# Altium PCB nexus5.PcbDoc (part 1 of 2)
Units mm, origin at the board's own origin, x right, y up, seen from the top; angles counter-clockwise.
Board outline 100 x 100 mm, 2 copper layers (Top Layer, Bottom Layer); 163 components, 162 nets, 798 pads, 136 vias.
Unrouted connection lines stored in the file: 4.
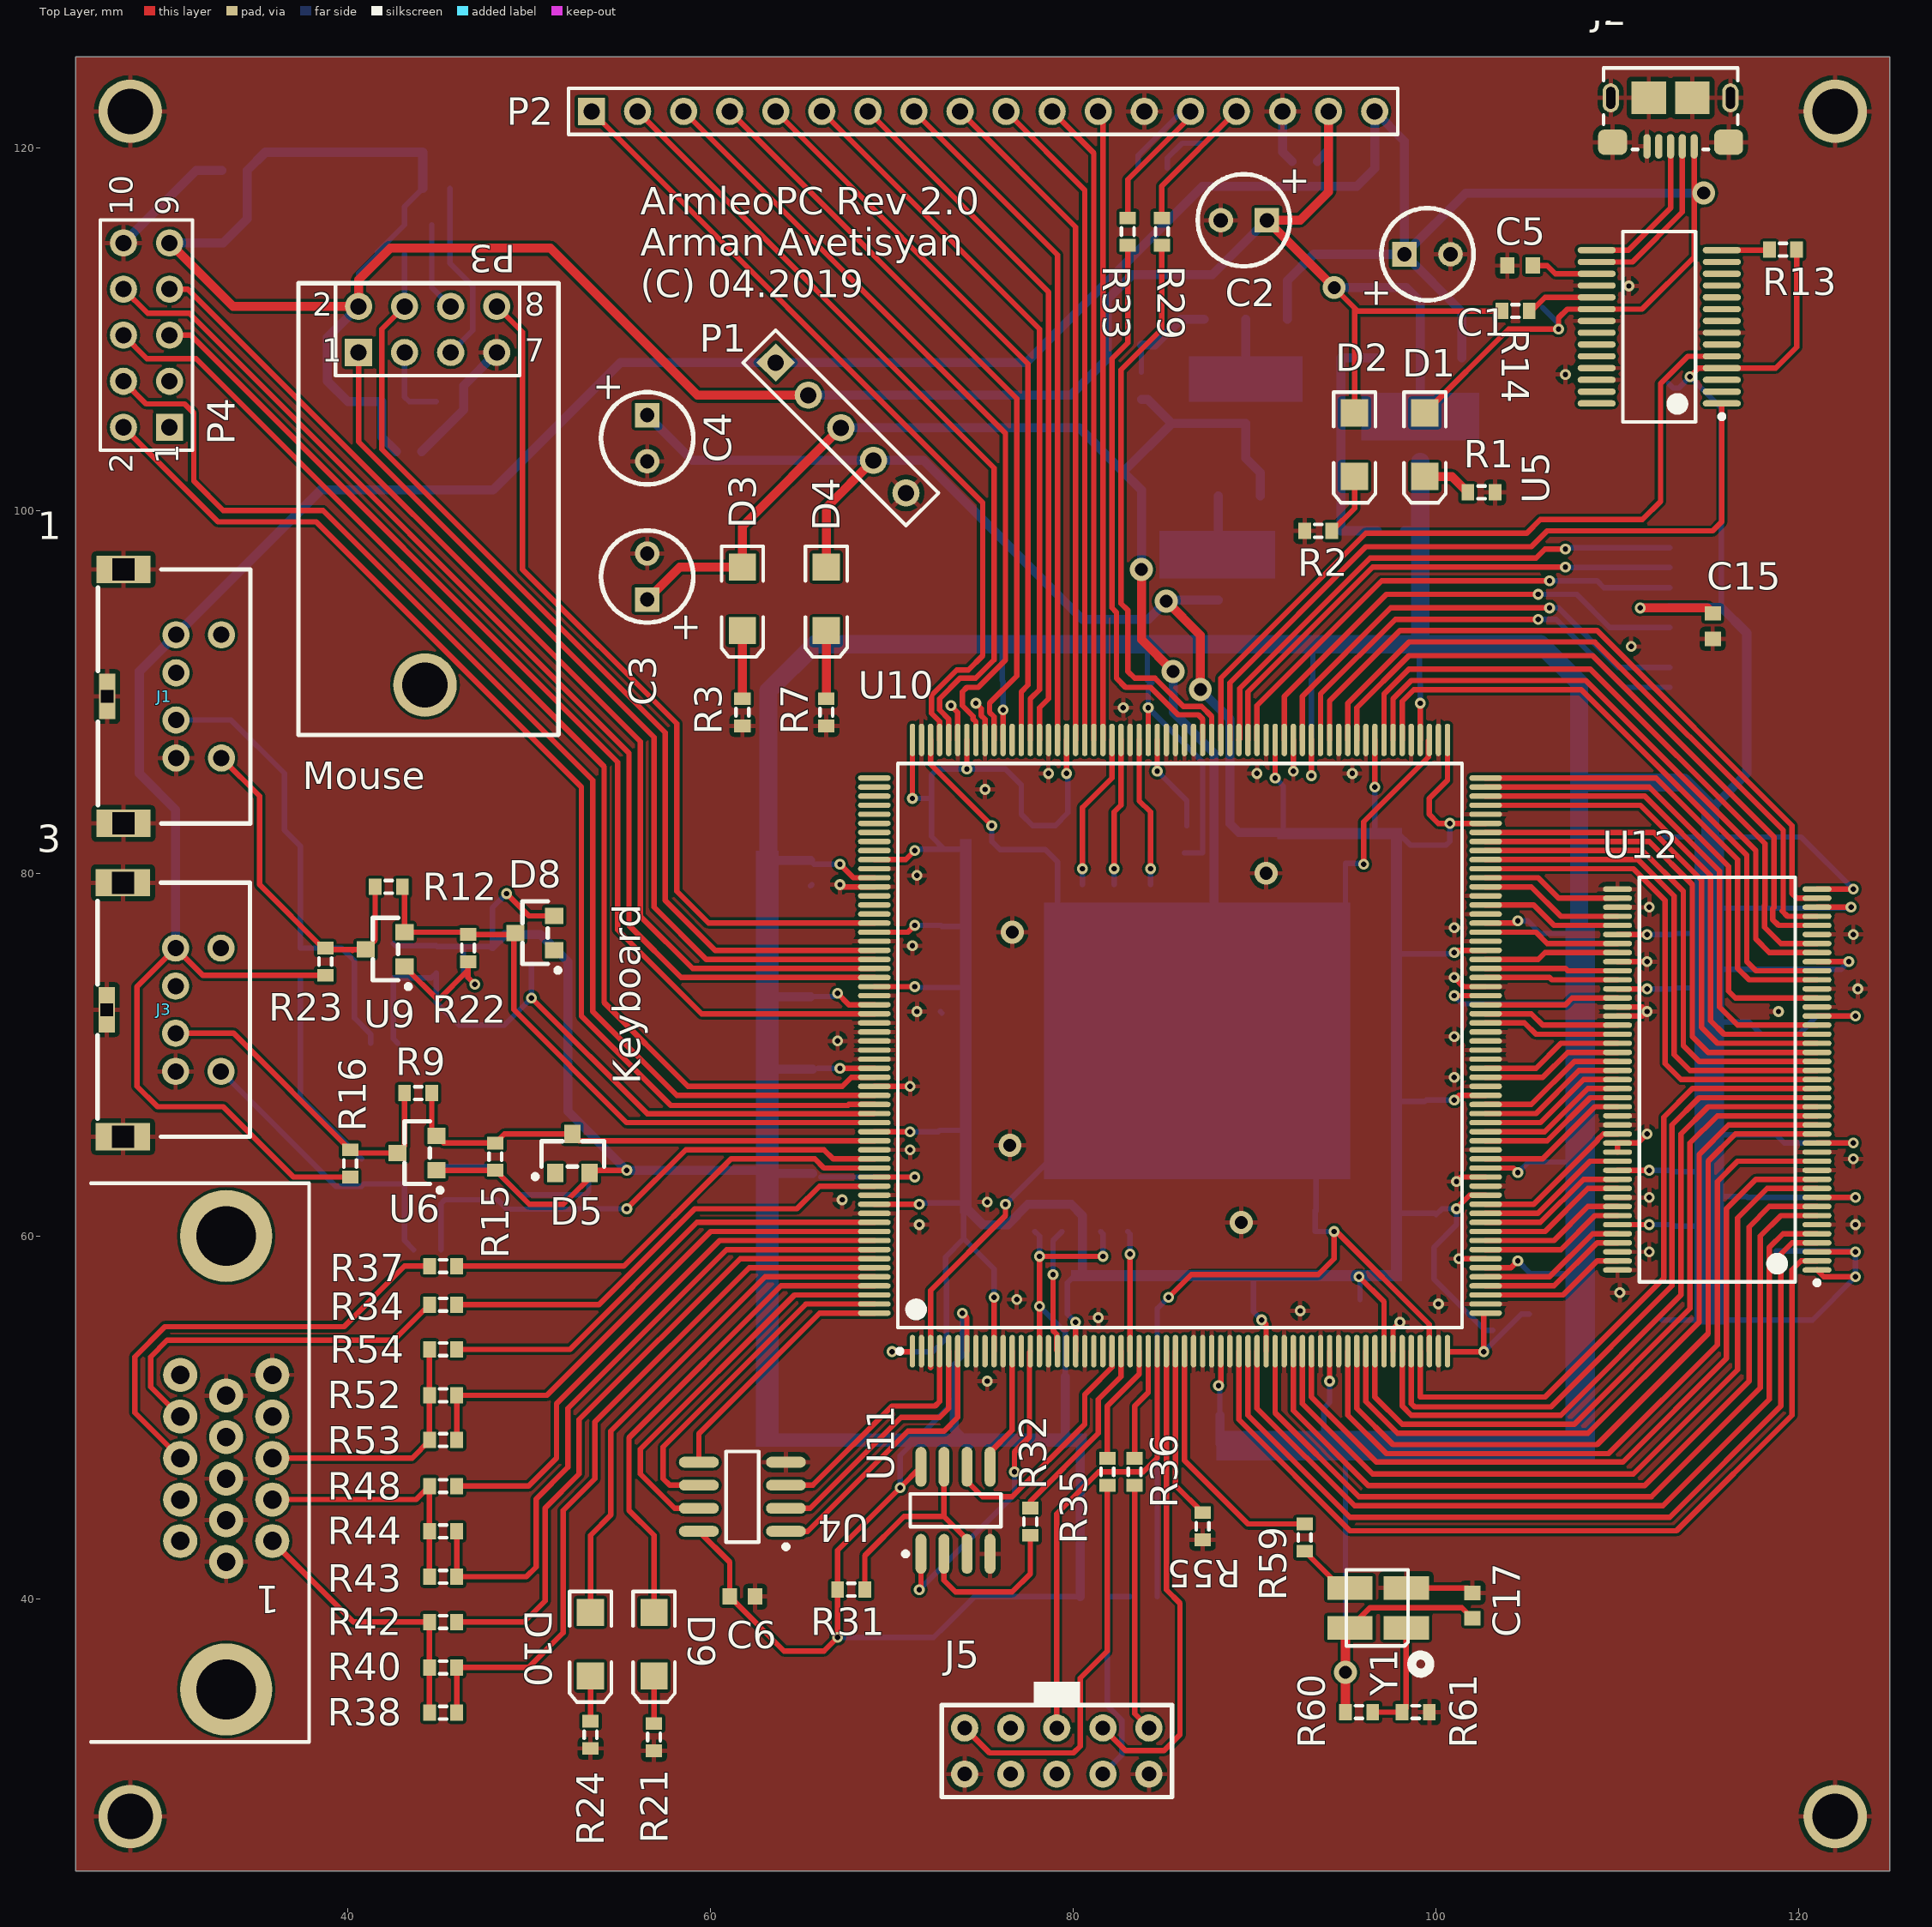
[diagram p0: Top Layer view]
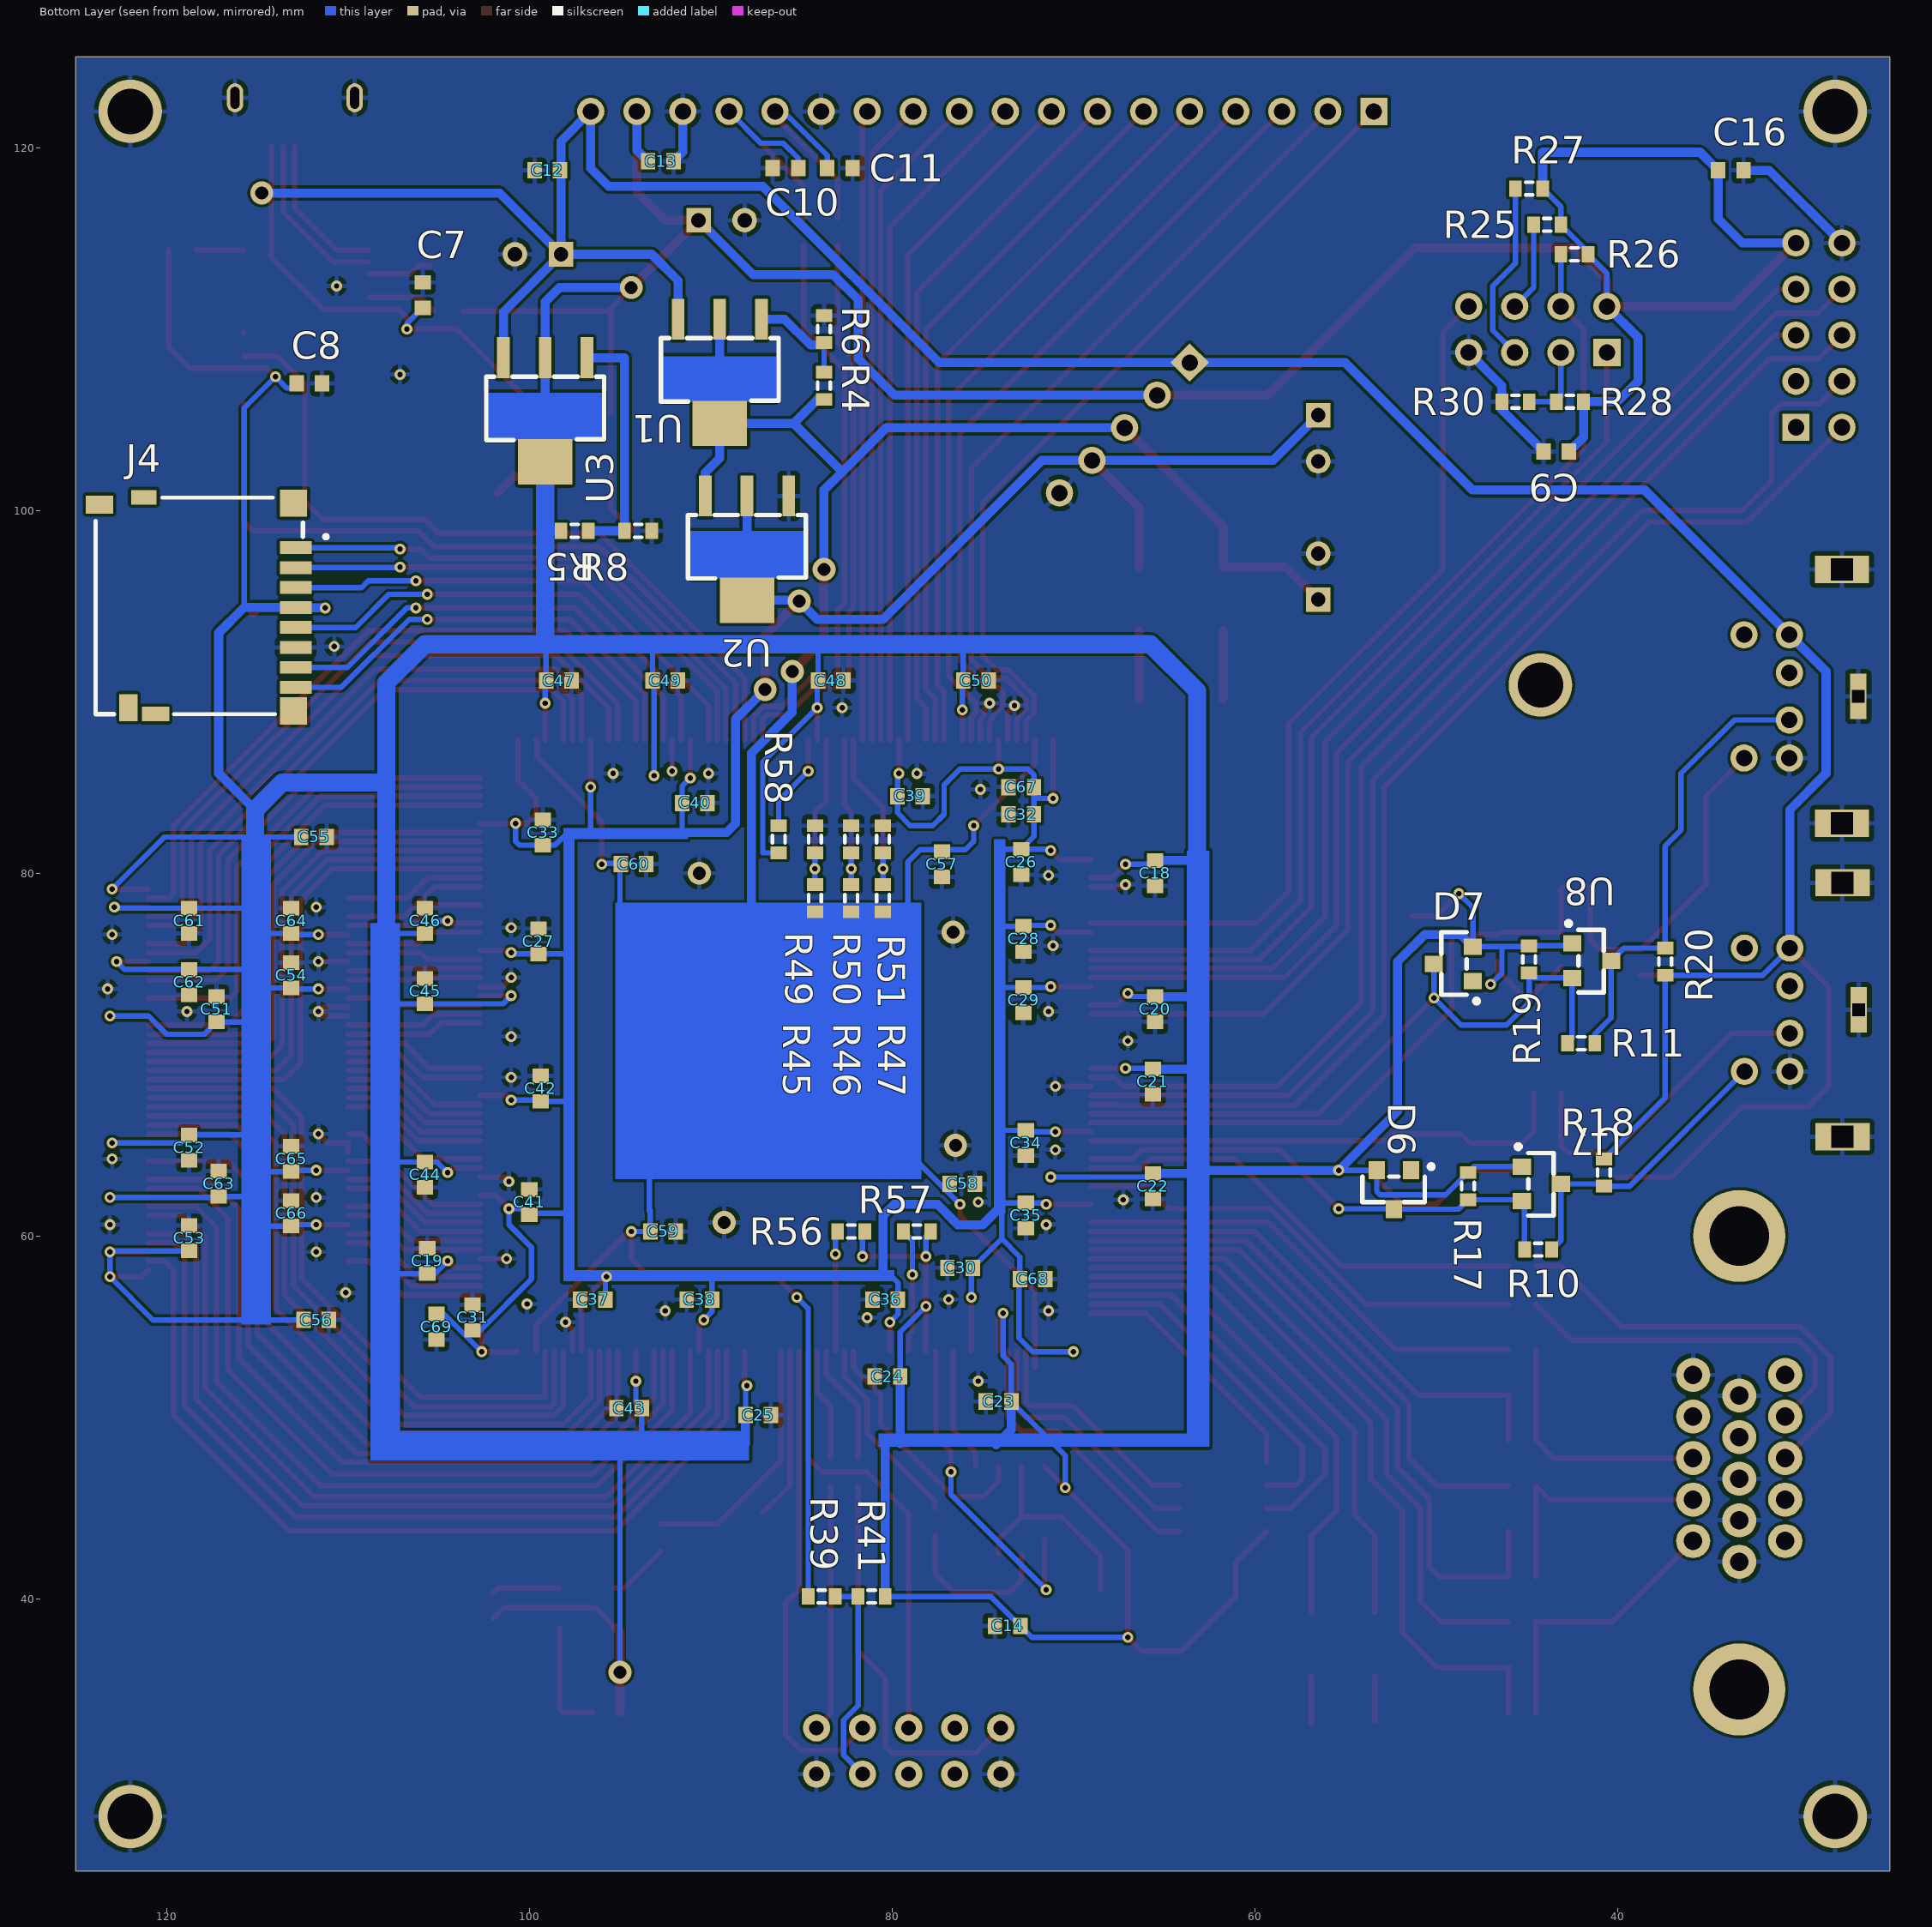
[diagram p1: Bottom Layer view, seen from below]

## Layer stack, top to bottom
Top Solder: solder mask 0.0102, Solder Resist, Dk 3.5
Top Layer: signal copper 0.0356
Dielectric 1: dielectric 0.32, FR-4, Dk 4.8
Bottom Layer: signal copper 0.0356
Bottom Solder: solder mask 0.0102, Solder Resist, Dk 3.5

## Board outline
25,25 125,25 125,125 25,125

## Design rules (kind name [scope] priority, off if disabled: settings)
Clearance [All] p1: gap=0.152 ignorepadtopadclearanceinfootprint=FALSE
Height [All] p1: minheight=0 maxheight=100 prefheight=12.7
HoleSize [All] p1: absolutevalues=TRUE maxlimit=6.3 minlimit=0.3 maxpercent=80.000 minpercent=20.000
MinimumSolderMaskSliver [All] p1: minsoldermaskwidth=0.152
PolygonConnect [All] p1: connectstyle=Relief reliefconductorwidth=0.254 reliefentries=4 polygonreliefangle="90 Angle" airgapwidth=0.254
RoomDefinition nexus5 [InComponentClass('nexus5')] p1: confinementstyle=ConfineIn formatcopy=TRUE lockcomponents=FALSE outline 12.75,11.625 139.125,11.625 139.125,138 12.75,138
RoutingTopology [All] p1: topology=Horizontal
RoutingVias [All] p1: holewidth=0.3 width=0.6 viastyle="Through Hole" minholewidth=0.3 minwidth=0.6 maxholewidth=6.3 maxwidth=6.3
SilkToSilkClearance [All] p1: silktosilkclearance=0.152
SolderMaskExpansion [All] p1: expansion=0.15
Width [All] p1: maxlimit=6.3 minlimit=0.3 preferedwidth=0.3
25 further rules are at their usual default settings.

## Components (designator, comment, footprint, x,y, rotation, side; value= is the part's Value field where it differs from the comment)
1 "DB15" *DB15 28.21,47.502 r90 top
C1 "Cap2" "Small Cap Pol" 98.25,114.125 r0 top value=470uF
C2 "Cap2" "Small Cap Pol" 90.665,116 r180 top value=470uF
C3 "Cap2" "Small Cap Pol" 56.5,95.085 r90 top value=470uF
C4 "Cap2" "Small Cap Pol" 56.5,105.25 r270 top value=470uF
C5 "Cap Semi" 1608[0603] 104.625,113.5 r180 top value=100pF
C6 "Cap Semi" 1608[0603] 61.75,40.125 r180 top value=100pF
C7 "Cap Semi" 1608[0603] 105.875,111.875 r90 bottom value=100pF
C8 "Cap Semi" 1608[0603] 112.125,107 r180 bottom value=100pF
C9 "Cap Semi" 1608[0603] 43.375,103.25 r180 bottom value=100pF
C10 "Cap Semi" 1608[0603] 85.875,118.875 r180 bottom value=1nF
C11 "Cap Semi" 1608[0603] 82.875,118.875 r0 bottom value=1nF
C12 "Cap Semi" 1608[0603] 99,118.75 r180 bottom value=100pF
C13 "Cap Semi" 1608[0603] 92.75,119.25 r0 bottom value=100pF
C14 "Cap Semi" 1608[0603] 73.625,38.5 r180 bottom value=100pF
C15 "Cap Semi" 1608[0603] 115.25,93.625 r90 top value=100pF
C16 "Cap Semi" 1608[0603] 33.75,118.75 r0 bottom value=100pF
C17 "Cap Semi" 1608[0603] 102,39.625 r270 top value=100pF
C18 "Cap Semi" 1608[0603] 65.5,80 r90 bottom value=100pF
C19 "Cap Semi" 1608[0603] 105.625,58.625 r270 bottom value=100pF
C20 "Cap Semi" 1608[0603] 65.5,72.5 r90 bottom value=100pF
C21 "Cap Semi" 1608[0603] 65.625,68.5 r90 bottom value=100pF
C22 "Cap Semi" 1608[0603] 65.625,62.75 r90 bottom value=100pF
C23 "Cap Semi" 1608[0603] 74.125,50.875 r180 bottom value=100pF
C24 "Cap Semi" 1608[0603] 80.25,52.25 r180 bottom value=100pF
C25 "Cap Semi" 1608[0603] 87.375,50.125 r0 bottom value=100pF
C26 "Cap Semi" 1608[0603] 72.875,80.625 r90 bottom value=100pF
C27 "Cap Semi" 1608[0603] 99.5,76.25 r270 bottom value=100pF
C28 "Cap Semi" 1608[0603] 72.75,76.375 r90 bottom value=100pF
C29 "Cap Semi" 1608[0603] 72.75,73 r90 bottom value=100pF
C30 "Cap Semi" 1608[0603] 76.25,58.25 r180 bottom value=100pF
C31 "Cap Semi" 1608[0603] 103.125,55.5 r270 bottom value=100pF
C32 "Cap Semi" 1608[0603] 72.875,83.25 r180 bottom value=100pF
C33 "Cap Semi" 1608[0603] 99.25,82.25 r270 bottom value=100pF
C34 "Cap Semi" 1608[0603] 72.625,65.125 r90 bottom value=100pF
C35 "Cap Semi" 1608[0603] 72.625,61.125 r90 bottom value=100pF
C36 "Cap Semi" 1608[0603] 80.375,56.5 r180 bottom value=100pF
C37 "Cap Semi" 1608[0603] 96.5,56.5 r180 bottom value=100pF
C38 "Cap Semi" 1608[0603] 90.625,56.5 r180 bottom value=100pF
C39 "Cap Semi" 1608[0603] 79,84.25 r0 bottom value=100pF
C40 "Cap Semi" 1608[0603] 90.875,83.875 r0 bottom value=100pF
C41 "Cap Semi" 1608[0603] 100,61.875 r270 bottom value=100pF
C42 "Cap Semi" 1608[0603] 99.375,68.125 r270 bottom value=100pF
C43 "Cap Semi" 1608[0603] 94.5,50.5 r180 bottom value=100pF
C44 "Cap Semi" 1608[0603] 105.75,63.375 r90 bottom value=100pF
C45 "Cap Semi" 1608[0603] 105.75,73.5 r270 bottom value=100pF
C46 "Cap Semi" 1608[0603] 105.75,77.375 r270 bottom value=100pF
C47 "Cap Semi" 1608[0603] 98.375,90.625 r0 bottom value=100pF
C48 "Cap Semi" 1608[0603] 83.375,90.625 r0 bottom value=100pF
C49 "Cap Semi" 1608[0603] 92.5,90.625 r0 bottom value=100pF
C50 "Cap Semi" 1608[0603] 75.375,90.625 r0 bottom value=100pF
C51 "Cap Semi" 1608[0603] 117.25,72.5 r270 bottom value=100pF
C52 "Cap Semi" 1608[0603] 118.75,64.875 r90 bottom value=100pF
C53 "Cap Semi" 1608[0603] 118.75,59.875 r270 bottom value=100pF
C54 "Cap Semi" 1608[0603] 113.125,74.375 r270 bottom value=100pF
C55 "Cap Semi" 1608[0603] 111.875,82 r0 bottom value=100pF
C56 "Cap Semi" 1608[0603] 111.75,55.375 r0 bottom value=100pF
C57 "Cap Semi" 1608[0603] 77.25,80.5 r90 bottom value=100pF
C58 "Cap Semi" 1608[0603] 76.125,62.875 r0 bottom value=100pF
C59 "Cap Semi" 1608[0603] 92.625,60.25 r0 bottom value=100pF
C60 "Cap Semi" 1608[0603] 94.25,80.5 r0 bottom value=100pF
C61 "Cap Semi" 1608[0603] 118.75,77.375 r90 bottom value=100pF
C62 "Cap Semi" 1608[0603] 118.75,74 r90 bottom value=100pF
C63 "Cap Semi" 1608[0603] 117.125,62.875 r270 bottom value=100pF
C64 "Cap Semi" 1608[0603] 113.125,77.375 r270 bottom value=100pF
C65 "Cap Semi" 1608[0603] 113.125,64.25 r270 bottom value=100pF
C66 "Cap Semi" 1608[0603] 113.125,61.25 r270 bottom value=100pF
C67 "Cap Semi" 1608[0603] 72.875,84.75 r180 bottom value=100pF
C68 "Cap Semi" 1608[0603] 72.25,57.625 r0 bottom value=100pF
C69 "Cap Semi" 1608[0603] 105.125,55 r90 bottom value=100pF
D1 "LED2" 3.2X1.6X1.1 99.375,103.625 r270 top
D2 "LED2" 3.2X1.6X1.1 95.5,103.625 r270 top
D3 "LED2" 3.2X1.6X1.1 61.75,95.125 r270 top
D4 "LED2" 3.2X1.6X1.1 66.375,95.125 r270 top
D5 "Double Diode" SOT-23 52.375,65.625 r0 top
D6 "Double Diode" SOT-23 52.325,61.475 r0 bottom
D7 "Double Diode" SOT-23 50.125,75 r90 bottom
D8 "Double Diode" SOT-23 49.225,76.7 r90 top
D9 "LED2" 3.2X1.6X1.1 56.875,37.5 r270 top
D10 "LED2" 3.2X1.6X1.1 53.374,37.5 r270 top
J1 "Mouse" MD-60S 26.725,89.75 r90 top
J2 "USB Micro" "FCI USB 10118193-0001LF" 112.925,122.7 r0 top
J3 "Keyboard" MD-60S 26.7,72.475 r90 top
J4 "1140084168" 1140084168 123.913,88.775 r90 bottom
J5 "2X5 2.54mm Conn with polarity" "2X5 with polarity" 84.165,30.335 r90 top
P1 "Header 5" HDR1X5 63.585,108.149 r315 top
P2 "Header 18" HDR1X18 53.43,122 r0 top
P3 "Header 4X2" HDR2X4 40.585,108.71 r0 top
P4 "Header 5X2" HDR2X5 30.165,104.585 r90 top
R1 "Res3" J1-0603 102.5,101 r180 top value=1K
R2 "Res3" J1-0603 93.5,98.875 r0 top value=500
R3 "Res3" J1-0603 61.75,88.875 r90 top value=500
R4 "Res3" J1-0603 83.75,106.875 r270 bottom value=1K
R5 "Res3" J1-0603 97.5,98.875 r0 bottom value=1400
R6 "Res3" J1-0603 83.75,110 r270 bottom value=1K
R7 "Res3" J1-0603 66.375,88.875 r90 top value=500
R8 "Res3" J1-0603 94,98.875 r0 bottom value=1K
R9 "Res3" J1-0603 43.875,67.875 r0 top value=0
R10 "Res3" J1-0603 44.375,59.25 r0 bottom value=0
R11 "Res3" J1-0603 42,70.625 r0 bottom value=0
R12 "Res3" J1-0603 42.25,79.25 r0 top value=0
R13 "Res3" J1-0603 119.125,114.375 r0 top value=10K
R14 "Res3" J1-0603 104.375,111 r0 top value=10K
R15 "Res3" J1-0603 48.125,64.375 r270 top value=10K
R16 "Res3" J1-0603 40.125,64 r270 top value=10K
R17 "Res3" J1-0603 48.25,62.75 r90 bottom value=10K
R18 "Res3" J1-0603 40.75,63.5 r90 bottom value=10K
R19 "Res3" J1-0603 44.875,75.25 r90 bottom value=10K
R20 "Res3" J1-0603 37.375,75.125 r270 bottom value=10K
R21 "Res3" J1-0603 56.875,32.375 r90 top value=500
R22 "Res3" J1-0603 46.625,75.875 r270 top value=10K
R23 "Res3" J1-0603 38.75,75.125 r270 top value=10K
R24 "Res3" J1-0603 53.375,32.5 r90 top value=500
R25 "Res3" J1-0603 43.875,115.75 r180 bottom value=10K
R26 "Res3" J1-0603 42.375,114.125 r180 bottom value=10K
R27 "Res3" J1-0603 44.875,117.75 r180 bottom value=10K
R28 "Res3" J1-0603 42.625,106 r180 bottom value=10K
R29 "Res3" J1-0603 84.875,115.375 r90 top value=8K
R30 "Res3" J1-0603 45.625,106 r180 bottom value=10K
R31 "Res3" J1-0603 67.75,40.5 r180 top value=1K
R32 "Res3" J1-0603 77.625,44.25 r90 top value=27
R33 "Res3" J1-0603 83,115.375 r90 top value=8K
R34 "Res3" J1-0603 45.25,56.217 r0 top value=47
R35 "Res3" J1-0603 81.875,47 r90 top value=27
R36 "Res3" J1-0603 83.375,47 r90 top value=27
R37 "Res3" J1-0603 45.25,58.342 r0 top value=47
R38 "Res3" J1-0603 45.25,33.717 r180 top value=1K
R39 "Res3" J1-0603 83.875,40.125 r0 bottom value=0
R40 "Res3" J1-0603 45.25,36.217 r180 top value=1K
R41 "Res3" J1-0603 81.125,40.125 r180 bottom value=0
R42 "Res3" J1-0603 45.25,38.717 r180 top value=1K
R43 "Res3" J1-0603 45.25,41.217 r180 top value=1K
R44 "Res3" J1-0603 45.25,43.717 r180 top value=1K
R45 "Res3" J1-0603 84.25,78.625 r270 bottom value=0
R46 "Res3" J1-0603 82.25,78.625 r270 bottom value=0
R47 "Res3" J1-0603 80.5,78.625 r270 bottom value=0
R48 "Res3" J1-0603 45.25,46.217 r180 top value=1K
R49 "Res3" J1-0603 84.25,81.875 r270 bottom value=0
R50 "Res3" J1-0603 82.25,81.875 r270 bottom value=0
R51 "Res3" J1-0603 80.5,81.875 r270 bottom value=0
R52 "Res3" J1-0603 45.25,51.217 r180 top value=500
R53 "Res3" J1-0603 45.25,48.75 r180 top value=1K
R54 "Res3" J1-0603 45.25,53.75 r180 top value=1K
R55 "Res3" J1-0603 87.125,44 r270 top value=10K
R56 "Res3" J1-0603 82.25,60.25 r0 bottom value=10K
R57 "Res3" J1-0603 78.625,60.25 r0 bottom value=10K
R58 "Res3" J1-0603 86.25,81.875 r90 bottom value=10K
R59 "Res3" J1-0603 92.75,43.375 r270 top value=50
R60 "Res3" J1-0603 95.75,33.75 r0 top value=0
R61 "Res3" J1-0603 98.875,33.75 r0 top value=0
U1 "AMS1117-ADJ" SOT-223 89.5,107.75 r0 bottom
U2 "AMS1117-1.2V" SOT-223 88,98 r0 bottom
U3 "AMS1117-ADJ" SOT-223 99.125,105.625 r0 bottom
U4 "M25P16-VMN3PB" MICT-MN-8_N 61.75,45.625 r180 top
U5 "FT232RL-Reel" SSOP-28_N 112.3,110.125 r180 top
U6 "BSS138" SOT-23 42.725,64.575 r90 top
U7 "BSS138" SOT-23 43.125,62.875 r270 bottom
U8 "BSS138" SOT-23 40.35,75.175 r270 bottom
U9 "BSS138" SOT-23 40.975,75.8 r90 top
U10 "EP3C25Q240C8" PQFP240_N 85.875,70.5 r90 top
U11 "M25P16-VMN3PB" MICT-MN-8_N 73.5,44.875 r90 top
U12 "MT48LC4M32B2TG-7" MICT-TG-86_N 115.5,68.625 r180 top
Y1 "Abracon XO ASE" "ABRACON ASE" 96.75,39.5 r90 top

## Footprints (in the part's own frame and the unit in brackets; to place one, negate y for a bottom-side part, rotate by r counter-clockwise, add the part's x,y. Pads: shape width x height; smd on the part's side, far side on the other; paste and mask are expansions set on the pad)
"2X5 with polarity" [mm]
  round 1.5 hole 0.8: 1(2.54,0) 2(0,0) 3(2.54,2.54) 4(0,2.54) 5(2.54,5.08) 6(0,5.08) 7(2.54,7.62) 8(0,7.62) 9(2.54,10.16) 10(0,10.16)
  silkscreen extent -1.27,-1.27 5.08,11.43
3.2X1.6X1.1 [mm] "SMT LED; 2 Flat Leads"
  rect 1.5x1.5 smd: 1(-1.75,0) 2(1.75,0)
  silkscreen extent -2.9,-1.15 3.2,1.15
1608[0603] [mm] "Chip Capacitor, Body 1.6x0.8mm, IPC High Density"
  rect 0.8x0.9 smd: 1(-0.7,0) 2(0.7,0)
  body extent -0.87,-0.48 0.87,0.48, height 1.3
1140084168 [mm]
  rect 0.7x1.75 smd: 1(9.175,-11.038) 6(3.675,-11.038)
  rect 0.701x1.753 smd: 2(8.075,-11.038) 8(1.475,-11.038)
  rect 0.701x1.752 smd: 3(6.975,-11.038) 4(5.875,-11.038) 5(4.775,-11.038) 7(2.575,-11.038)
  rect 1.501x1.501 smd: 9(0.175,-10.913)
  rect 1.502x1.502 smd: 10(11.625,-10.913)
  rect 0.801x1.501 smd: 11(0,-3.313)
  rect 0.8x1.401 smd: 12(11.95,-2.663)
  rect 1.5x1 smd: 13(0.355,-1.813)
  rect 1.001x1.502 smd: 14(11.55,-0.213)
  silkscreen extent 0,-12.81 11.94,0
*DB15 [mil]
  round 74 hole 40: 1(-170.08,-300) 2(-79.92,-300) 3(10.24,-300) 4(100.39,-300) 5(190.55,-300) 6(-214.96,-200) 7(-124.8,-200) 8(-34.65,-200) 9(55.51,-200) 10(145.67,-200) 11(-170.08,-100) 12(-79.92,-100) 13(10.24,-100) 14(100.39,-100) 15(190.55,-100)
  round 200 hole 130: G1(-492.13,-200) G2(492.13,-200)
  silkscreen extent -606,-380 606,94
"ABRACON ASE" [mm] "Crystal, 4-Leads, Body 2.50x3.20mm, Pitch 2.20mm, IPC Medium Density"
  rect 1.3x2.5 smd: 1(-1.1,-1.6) 2(1.1,-1.6) 3(1.1,1.5) 4(-1.1,1.5)
  silkscreen extent -3.6,-2.9 2.1,1.7, body extent -1.62,-1.27 1.63,1.28, height 1.2
"FCI USB 10118193-0001LF" [mm] "USB 2.0 Type B Micro"
  oval 0.4x1.35 smd: 1(1.3,-2.625) 2(0.65,-2.625) 3(0,-2.625) 4(-0.65,-2.625) 5(-1.3,-2.625)
  oval 0.9x1.6 hole 0.5 slot 1.2 at 90 deg: S(-3.3,0.05) S(3.3,0.05)
  rrect50% 1.6x1.4 smd: S(-3.2,-2.4) S(3.2,-2.4)
  rect 1.9x1.8 smd: S(-1.2,0.05) S(1.2,0.05)
  silkscreen extent -3.7,-2.8 3.7,1.7
HDR1X5 [mm] "Connector; Header; 5 Position"
  rect 1.5x1.5 hole 0.9: 1(0,0)
  round 1.5 hole 0.9: 2(2.54,0) 3(5.08,0) 4(7.62,0) 5(10.16,0)
  silkscreen extent -1.27,-1.27 11.43,1.27
HDR1X18 [mm] "Connector; Header; 18 Position"
  rect 1.5x1.5 hole 0.9: 1(0,0)
  round 1.5 hole 0.9: 2(2.54,0) 3(5.08,0) 4(7.62,0) 5(10.16,0) 6(12.7,0) 7(15.24,0) 8(17.78,0) 9(20.32,0) 10(22.86,0) 11(25.4,0) 12(27.94,0) 13(30.48,0) 14(33.02,0) 15(35.56,0) 16(38.1,0) 17(40.64,0) 18(43.18,0)
  silkscreen extent -1.27,-1.27 44.45,1.27
HDR2X4 [mm] "Connector; Header; 4x2 Position"
  rect 1.5x1.5 hole 0.9: 1(0,0)
  round 1.5 hole 0.9: 2(0,2.54) 3(2.54,0) 4(2.54,2.54) 5(5.08,0) 6(5.08,2.54) 7(7.62,0) 8(7.62,2.54)
  silkscreen extent -1.27,-1.27 8.89,3.81
HDR2X5 [mm] "Connector; Header; 5x2 Position"
  rect 1.5x1.5 hole 0.9: 1(0,0)
  round 1.5 hole 0.9: 2(0,2.54) 3(2.54,0) 4(2.54,2.54) 5(5.08,0) 6(5.08,2.54) 7(7.62,0) 8(7.62,2.54) 9(10.16,0) 10(10.16,2.54)
  silkscreen extent -1.27,-1.27 11.43,3.81
J1-0603 [mm] "Chip Resistor, Body 1.6x0.8mm, IPC High Density"
  rect 0.7x0.9 smd: 1(-0.75,0) 2(0.75,0)
  silkscreen extent -0.2,-0.35 0.2,0.35, body extent -0.85,-0.48 0.85,0.48, height 0.9
MD-60S [mm]
  rect 1.5x3 hole 1.2 square: 0(-7,-0.9) 0(7,-0.9)
  rect 2.5x0.9 hole 0.7 square: 0(0,0)
  round 1.5 hole 0.9: 1(-1.3,-3.8) 2(1.3,-3.8) 3(-3.4,-3.8) 4(3.4,-3.8) 5(-3.4,-6.3) 6(3.4,-6.3)
  silkscreen extent -7,-7.9 7,0.5
MICT-MN-8_N [mm] "SOIC, 8-Leads, Body 5x4mm, Pitch 1.27mm, IPC Medium Density"
  oval 2.2x0.6 smd: 1(-2.4,1.905) 2(-2.4,0.635) 3(-2.4,-0.635) 4(-2.4,-1.905) 5(2.4,-1.905) 6(2.4,-0.635) 7(2.4,0.635) 8(2.4,1.905)
  silkscreen extent -2.53,-2.5 0.9,2.88, body extent -2,-2.5 2,2.5, height 0.1
MICT-TG-86_N [mm] "SOP, 86-Leads, Body 22.22x10.16mm, Pitch 0.5mm, IPC Medium Density"
  oval 1.6x0.3 smd: 1(-5.5,10.5) 2(-5.5,10) 3(-5.5,9.5) 4(-5.5,9) 5(-5.5,8.5) 6(-5.5,8) 7(-5.5,7.5) 8(-5.5,7) 9(-5.5,6.5) 10(-5.5,6) 11(-5.5,5.5) 12(-5.5,5) 13(-5.5,4.5) 14(-5.5,4) 15(-5.5,3.5) 16(-5.5,3) 17(-5.5,2.5) 18(-5.5,2) 19(-5.5,1.5) 20(-5.5,1) 21(-5.5,0.5) 22(-5.5,0) 23(-5.5,-0.5) 24(-5.5,-1) 25(-5.5,-1.5) 26(-5.5,-2) 27(-5.5,-2.5) 28(-5.5,-3) 29(-5.5,-3.5) 30(-5.5,-4) 31(-5.5,-4.5) 32(-5.5,-5) 33(-5.5,-5.5) 34(-5.5,-6) 35(-5.5,-6.5) 36(-5.5,-7) 37(-5.5,-7.5) 38(-5.5,-8) 39(-5.5,-8.5) 40(-5.5,-9) 41(-5.5,-9.5) 42(-5.5,-10) 43(-5.5,-10.5) 44(5.5,-10.5) 45(5.5,-10) 46(5.5,-9.5) 47(5.5,-9) 48(5.5,-8.5) 49(5.5,-8) 50(5.5,-7.5) 51(5.5,-7) 52(5.5,-6.5) 53(5.5,-6) 54(5.5,-5.5) 55(5.5,-5) 56(5.5,-4.5) 57(5.5,-4) 58(5.5,-3.5) 59(5.5,-3) 60(5.5,-2.5) 61(5.5,-2) 62(5.5,-1.5) 63(5.5,-1) 64(5.5,-0.5) 65(5.5,0) 66(5.5,0.5) 67(5.5,1) 68(5.5,1.5) 69(5.5,2) 70(5.5,2.5) 71(5.5,3) 72(5.5,3.5) 73(5.5,4) 74(5.5,4.5) 75(5.5,5) 76(5.5,5.5) 77(5.5,6) 78(5.5,6.5) 79(5.5,7) 80(5.5,7.5) 81(5.5,8) 82(5.5,8.5) 83(5.5,9) 84(5.5,9.5) 85(5.5,10) 86(5.5,10.5)
  silkscreen extent -5.63,-11.15 4.3,11.32, body extent -5.1,-11.15 5.1,11.15, height 1.2
PQFP240_N [mm] "Shrink QFP, 240-Leads, Body 32x32mm, Pitch 0.5mm, IPC Medium Density"
  oval 1.8x0.3 smd: 1(-16.85,14.75) 2(-16.85,14.25) 3(-16.85,13.75) 4(-16.85,13.25) 5(-16.85,12.75) 6(-16.85,12.25) 7(-16.85,11.75) 8(-16.85,11.25) 9(-16.85,10.75) 10(-16.85,10.25) 11(-16.85,9.75) 12(-16.85,9.25) 13(-16.85,8.75) 14(-16.85,8.25) 15(-16.85,7.75) 16(-16.85,7.25) 17(-16.85,6.75) 18(-16.85,6.25) 19(-16.85,5.75) 20(-16.85,5.25) 21(-16.85,4.75) 22(-16.85,4.25) 23(-16.85,3.75) 24(-16.85,3.25) 25(-16.85,2.75) 26(-16.85,2.25) 27(-16.85,1.75) 28(-16.85,1.25) 29(-16.85,0.75) 30(-16.85,0.25) 31(-16.85,-0.25) 32(-16.85,-0.75) 33(-16.85,-1.25) 34(-16.85,-1.75) 35(-16.85,-2.25) 36(-16.85,-2.75) 37(-16.85,-3.25) 38(-16.85,-3.75) 39(-16.85,-4.25) 40(-16.85,-4.75) 41(-16.85,-5.25) 42(-16.85,-5.75) 43(-16.85,-6.25) 44(-16.85,-6.75) 45(-16.85,-7.25) 46(-16.85,-7.75) 47(-16.85,-8.25) 48(-16.85,-8.75) 49(-16.85,-9.25) 50(-16.85,-9.75) 51(-16.85,-10.25) 52(-16.85,-10.75) 53(-16.85,-11.25) 54(-16.85,-11.75) 55(-16.85,-12.25) 56(-16.85,-12.75) 57(-16.85,-13.25) 58(-16.85,-13.75) 59(-16.85,-14.25) 60(-16.85,-14.75) 121(16.85,-14.75) 122(16.85,-14.25) 123(16.85,-13.75) 124(16.85,-13.25) 125(16.85,-12.75) 126(16.85,-12.25) 127(16.85,-11.75) 128(16.85,-11.25) 129(16.85,-10.75) 130(16.85,-10.25) 131(16.85,-9.75) 132(16.85,-9.25) 133(16.85,-8.75) 134(16.85,-8.25) 135(16.85,-7.75) 136(16.85,-7.25) 137(16.85,-6.75) 138(16.85,-6.25) 139(16.85,-5.75) 140(16.85,-5.25) 141(16.85,-4.75) 142(16.85,-4.25) 143(16.85,-3.75) 144(16.85,-3.25) 145(16.85,-2.75) 146(16.85,-2.25) 147(16.85,-1.75) 148(16.85,-1.25) 149(16.85,-0.75) 150(16.85,-0.25) 151(16.85,0.25) 152(16.85,0.75) 153(16.85,1.25) 154(16.85,1.75) 155(16.85,2.25) 156(16.85,2.75) 157(16.85,3.25) 158(16.85,3.75) 159(16.85,4.25) 160(16.85,4.75) 161(16.85,5.25) 162(16.85,5.75) 163(16.85,6.25) 164(16.85,6.75) 165(16.85,7.25) 166(16.85,7.75) 167(16.85,8.25) 168(16.85,8.75) 169(16.85,9.25) 170(16.85,9.75) 171(16.85,10.25) 172(16.85,10.75) 173(16.85,11.25) 174(16.85,11.75) 175(16.85,12.25) 176(16.85,12.75) 177(16.85,13.25) 178(16.85,13.75) 179(16.85,14.25) 180(16.85,14.75)
  oval 0.3x1.8 smd: 61(-14.75,-16.85) 62(-14.25,-16.85) 63(-13.75,-16.85) 64(-13.25,-16.85) 65(-12.75,-16.85) 66(-12.25,-16.85) 67(-11.75,-16.85) 68(-11.25,-16.85) 69(-10.75,-16.85) 70(-10.25,-16.85) 71(-9.75,-16.85) 72(-9.25,-16.85) 73(-8.75,-16.85) 74(-8.25,-16.85) 75(-7.75,-16.85) 76(-7.25,-16.85) 77(-6.75,-16.85) 78(-6.25,-16.85) 79(-5.75,-16.85) 80(-5.25,-16.85) 81(-4.75,-16.85) 82(-4.25,-16.85) 83(-3.75,-16.85) 84(-3.25,-16.85) 85(-2.75,-16.85) 86(-2.25,-16.85) 87(-1.75,-16.85) 88(-1.25,-16.85) 89(-0.75,-16.85) 90(-0.25,-16.85) 91(0.25,-16.85) 92(0.75,-16.85) 93(1.25,-16.85) 94(1.75,-16.85) 95(2.25,-16.85) 96(2.75,-16.85) 97(3.25,-16.85) 98(3.75,-16.85) 99(4.25,-16.85) 100(4.75,-16.85) 101(5.25,-16.85) 102(5.75,-16.85) 103(6.25,-16.85) 104(6.75,-16.85) 105(7.25,-16.85) 106(7.75,-16.85) 107(8.25,-16.85) 108(8.75,-16.85) 109(9.25,-16.85) 110(9.75,-16.85) 111(10.25,-16.85) 112(10.75,-16.85) 113(11.25,-16.85) 114(11.75,-16.85) 115(12.25,-16.85) 116(12.75,-16.85) 117(13.25,-16.85) 118(13.75,-16.85) 119(14.25,-16.85) 120(14.75,-16.85) 181(14.75,16.85) 182(14.25,16.85) 183(13.75,16.85) 184(13.25,16.85) 185(12.75,16.85) 186(12.25,16.85) 187(11.75,16.85) 188(11.25,16.85) 189(10.75,16.85) 190(10.25,16.85) 191(9.75,16.85) 192(9.25,16.85) 193(8.75,16.85) 194(8.25,16.85) 195(7.75,16.85) 196(7.25,16.85) 197(6.75,16.85) 198(6.25,16.85) 199(5.75,16.85) 200(5.25,16.85) 201(4.75,16.85) 202(4.25,16.85) 203(3.75,16.85) 204(3.25,16.85) 205(2.75,16.85) 206(2.25,16.85) 207(1.75,16.85) 208(1.25,16.85) 209(0.75,16.85) 210(0.25,16.85) 211(-0.25,16.85) 212(-0.75,16.85) 213(-1.25,16.85) 214(-1.75,16.85) 215(-2.25,16.85) 216(-2.75,16.85) 217(-3.25,16.85) 218(-3.75,16.85) 219(-4.25,16.85) 220(-4.75,16.85) 221(-5.25,16.85) 222(-5.75,16.85) 223(-6.25,16.85) 224(-6.75,16.85) 225(-7.25,16.85) 226(-7.75,16.85) 227(-8.25,16.85) 228(-8.75,16.85) 229(-9.25,16.85) 230(-9.75,16.85) 231(-10.25,16.85) 232(-10.75,16.85) 233(-11.25,16.85) 234(-11.75,16.85) 235(-12.25,16.85) 236(-12.75,16.85) 237(-13.25,16.85) 238(-13.75,16.85) 239(-14.25,16.85) 240(-14.75,16.85)
  silkscreen extent -16.97,-15.55 15.55,15.57, body extent -16,-16 16,16, height 4.1
"Small Cap Pol" [mm] "Small Capacitor with Pol"
  rect 1.35x1.35 hole 0.8: 1(0,0)
  round 1.35 hole 0.8: 2(2.54,0)
  silkscreen extent -1.27,-2.54 3.81,2.54
SOT-23 [mm]
  rect 0.9x1 smd: 1(-0.95,-2.15) 2(0.95,-2.15) 3(0,0)
  silkscreen extent -2.15,-2.45 1.75,-0.4
SOT-223 [mm]
  rect 0.7x2.25 smd: 1(-2.3,-2.8) 2(0,-2.8) 3(2.3,-2.8)
  rect 3x2.5 smd: 2(0,2.95)
  silkscreen extent -3.25,-1.75 3.25,1.75
SSOP-28_N [mm] "SOP, 28-Leads, Body 10.2x5.3mm, Pitch 0.65mm, IPC Medium Density"
  oval 2.1x0.35 smd: 1(-3.45,4.225) 2(-3.45,3.575) 3(-3.45,2.925) 4(-3.45,2.275) 5(-3.45,1.625) 6(-3.45,0.975) 7(-3.45,0.325) 8(-3.45,-0.325) 9(-3.45,-0.975) 10(-3.45,-1.625) 11(-3.45,-2.275) 12(-3.45,-2.925) 13(-3.45,-3.575) 14(-3.45,-4.225) 15(3.45,-4.225) 16(3.45,-3.575) 17(3.45,-2.925) 18(3.45,-2.275) 19(3.45,-1.625) 20(3.45,-0.975) 21(3.45,-0.325) 22(3.45,0.325) 23(3.45,0.975) 24(3.45,1.625) 25(3.45,2.275) 26(3.45,2.925) 27(3.45,3.575) 28(3.45,4.225)
  silkscreen extent -3.57,-5.25 2,5.25, body extent -2.8,-5.25 2.8,5.25, height 2

## Part data
1: "Conn, f, 15rgb, 1 Piece", Package=None, Availability=Unavailable, MF="Belden Inc.", MP=DB15, Price=None, SnapEDA_Link=https://www.snapeda.com/parts/DB15/Belden%20Inc./view-part/?ref=snap
C1 C2 C3 C4: "Capacitor", PackageDescription="Capacitor; 2 Leads", PackageReference=CAPR5-4X5, Published=23-Sep-2002, Publisher="Altium Limited"
C5 C6 C7 C8 C9 C10 C11 C12 C13 C14 C15 C16 C17 C18 C19 C20 C21 C22 C23 C24 C25 C26 C27 C28 C29 C30 C31 C32 C33 C34 C35 C36 C37 C38 C39 C40 C41 C42 C43 C44 C45 C46 C47 C48 C49 C50 C51 C52 C53 C54 C55 C56 C57 C58 C59 C60 C61 C62 C63 C64 C65 C66 C67 C68 C69: "Capacitor (Semiconductor SIM Model)", LatestRevisionDate=29-May-2009, LatestRevisionNote="IPC-7351 Footprint Added.", PackageDescription="Chip Capacitor", PackageReference=C1206, Published=8-Jun-2000, Publisher="Altium Limited"
D1 D2 D3 D4 D9 D10: "Typical RED, GREEN, YELLOW, AMBER GaAs LED", LatestRevisionDate=17-Jul-2002, LatestRevisionNote="Re-released for DXP Platform.", PackageDescription="SM LED; 2 Flat Leads", PackageReference=3.2X1.6X1.1, PackageVersion=Feb-2002, Published=8-Jun-2000, Publisher="Altium Limited"
D5 D6 D7 D8: library part BAT54S
J1 J3: library part MD60S
J2: library part "USB 2.0 Type B Micro"
J4: "Memory Card Connector, Microsd, 8 Position, Full Reel", Package=None, Digi-Key_Part_Number=114-00841-68-1-ND, Digi-Key_Purchase_URL=https://www.digikey.com/product-detail/en/amphenol-icc-commercial-products/114-00841-68/114-00841-68-1-ND/2187101?utm_source=snapeda&utm_medium=aggregator&utm_campaign=symbol, MF="Amphenol ICC", MP=114-00841-68, SnapEDA_Link=https://www.snapeda.com/parts/114-00841-68/Amphenol%20ICC/view-part/?ref=snap
P1: "Header, 5-Pin", LatestRevisionDate=17-Jul-2002, LatestRevisionNote="Re-released for DXP Platform.", Publisher="Altium Limited"
P2: "Header, 18-Pin", LatestRevisionDate=17-Jul-2002, LatestRevisionNote="Re-released for DXP Platform.", Publisher="Altium Limited"
P3: "Header, 4-Pin, Dual row", LatestRevisionDate=17-Jul-2002, LatestRevisionNote="Re-released for DXP Platform.", Publisher="Altium Limited"
P4: "Header, 5-Pin, Dual row", LatestRevisionDate=17-Jul-2002, LatestRevisionNote="Re-released for DXP Platform.", Publisher="Altium Limited"
R1 R2 R3 R4 R5 R6 R7 R8 R9 R10 R11 R12 R13 R14 R15 R16 R17 R18 R19 R20 R21 R22 R23 R24 R25 R26 R27 R28 R29 R30 R31 R32 R33 R34 R35 R36 R37 R38 R39 R40 R41 R42 R43 R44 R45 R46 R47 R48 R49 R50 R51 R52 R53 R54 R55 R56 R57 R58 R59 R60 R61: "Resistor", LatestRevisionDate=29-May-2009, LatestRevisionNote="IPC-7351 Footprint Added.", PackageDescription="Chip Resistor", PackageReference=J1-0603, Published=8-Jun-2000, Publisher="Altium Limited"
U4 U11: "16 Mb (x1) Automotive Serial NOR Flash Memory, 75 MHz, 2.7 to 3.6 V, 8-pin SO8 Narrow (MN), Tube", Manufacturer=Micron, Package="SO8 Narrow", Voltage=2.7V-3.6V, Applications=Automotive, ComponentLink1Description="Manufacturer URL", ComponentLink1URL=http://www.micron.com/, ComponentLink2Description=Datasheet, ComponentLink2URL=http://www.micron.com/~/media/Documents/Products/Data%20Sheet/NOR%20Flash/Serial%20NOR/M25P/M25P16.pdf, ComponentLink3Description="Package Specification", ComponentLink3URL=http://www.micron.com/~/media/Documents/Products/Data%20Sheet/NOR%20Flash/Serial%20NOR/M25P/M25P05A.pdf, DatasheetVersion="Rev. Y", Density=16Mb, Mounting Technology="Surface Mount", PackageDescription="8-Pin SO Narrow, 3.9 X 4.9 mm, Pitch 1.27 mm", PackageReference=MICT-MN-8, PackageVersion="Rev 11", Part Family=M25P, PartNumber=M25P16-VMN3PB, Part Status=Production, RoHS=Yes, Speed="75 MHz", Type="Data Storage", Width=x1
U5: "USB UART Asynchronous Serial Data Transfer Chip, 28-pin SSOP, Tape and Reel", Manufacturer=FTDI, ComponentLink1Description="Manufacturer URL", ComponentLink1URL=http://www.ftdichip.com/, ComponentLink2Description=Datasheet, ComponentLink2URL=http://www.ftdichip.com/Support/Documents/DataSheets/ICs/DS_FT232R.pdf, DatasheetVersion="ver 2.10, Mar-2012", PackageDescription="28-Pin Small Outline Package 0.65 mm Pitch", PackageReference=SSOP-28, PackageVersion=Mar-12, PartNumber=FT232RL-Reel
U6 U7 U8 U9: "BSS138 SOT-23"
U10: "Cyclone III Family FPGA, 148 I/O Pins, 4 PLLs, 240-Pin PQFP, Speed Grade 8, Commercial Grade", Code_JEDEC=MS-029-GA, ComponentLink1Description="Manufacturer Link", ComponentLink1URL=http://www.altera.com/, ComponentLink2Description="Handbook (7.86MB)", ComponentLink2URL=http://www.altera.com/literature/hb/cyc3/cyclone3_handbook.pdf, ComponentLink3Description="Packaging Specification", ComponentLink3URL=http://www.altera.com/literature/ds/dspkg.pdf, DatasheetVersion="ver2.0, May-2008", PackageDescription="240-Pin Plastic Quad Flat Pack (PQFP240) - Wire Bond", PackageReference=PQFP240, PackageVersion="ver15.4, Dec-2008", Published=26-Feb-2007, Publisher="Altium Limited"
U12: "128Mb PC133 SDR SDRAM, 4Mb x 32, 7ns, 3.3V, 0 to 70 degC, 86-Pin TSOP", Manufacturer=Micron, Op. Temp.="0C to +70C", Voltage=3.3V, CL="CL = 3", Clock Rate="143 MHz", ComponentLink1Description="Manufacturer URL", ComponentLink1URL=http://www.micron.com/, ComponentLink2Description=Datasheet, ComponentLink2URL=http://www.micron.com/~/media/Documents/Products/Data%20Sheet/DRAM/128mb_x32_sdram.pdf, ComponentLink3Description="Package Specification", ComponentLink3URL=http://www.micron.com/~/media/Documents/Products/Data%20Sheet/DRAM/128mb_x32_sdram.pdf, Cycle Time=7ns, Data Rate=PC133, DatasheetVersion=Rev.Q, Density=128Mb, Depth=4Mb, Mounting Technology="Surface Mount", PackageDescription="86-Pin Thin Small Outline Package, 10.16 x 22.22 mm, Pitch 0.5 mm", PackageReference=MICT-TG-86, PackageVersion=Rev.Q, PartNumber=MT48LC4M32B2TG-7, RoHS=5/6, Width=x32
Y1: "SMD CMOS Crystal Oscillator"

## Free pads (board coordinates)
  round 3.5 hole 2.5: 3(28,28) 3(28,122) 3(44.25,90.375) 3(122,28) 3(122,122)

## Via types
v1: diameter 0.6, hole 0.3, Top Layer to Bottom Layer, tented both sides, 125 vias
v2: diameter 1.27, hole 0.711, Top Layer to Bottom Layer, tented both sides, 11 vias

## Nets (pads, with @x,y where several pads share a name; then routed paths per layer and width w, separated by ;. In a path a pad name is that pad's centre, name@x,y a point inside that pad or via, vN(x,y) a via of type N, cw(c..) or ccw(c..) an arc to the next point about the centre after c; other vN are vias at no path point)
1.2V: C4.1 C26.2 C27.2 C28.2 C29.2 C30.2 C31.2 C32.2 C33.2 C34.2 C35.2 C36.2 C37.2 C38.2 C39.2 C40.2 C41.2 C42.2 C67.2 C68.2 C69.2 D4.1 P1.4 U2.2 U10.1 U10.10 U10.19 U10.40 U10.53 U10.60 U10.61 U10.74 U10.85 U10.101 U10.115 U10.121 U10.129 U10.140 U10.163 U10.174 U10.180 U10.190 U10.198 U10.204 U10.220 U10.228 | length 213.6
  Top Layer w0.3: U10.228@69.025,61.75 v1(71.5,61.75) ; U10.220@69.025,65.75 v1(71,65.75) ; U10.204@69.025,73.75 v1(71.25,73.75) ; U10.198@69.025,76.75 70.875,76.75 v1(71.25,77.125) ; U10.190@69.025,80.75 70.75,80.75 v1(71.25,81.25) ; v1(70,53.625) 71.1,53.625 U10.1@71.125,53.65 ; v1(71.125,84.125) U10.180@71.125,87.35 ; v1(74.125,85.75) U10.174@74.125,87.35 ; U10.10@75.625,53.65 v1(75.625,56.625) ; v1(79.625,85.5) U10.163@79.625,87.35 ; U10.19@80.125,53.65 v1(80.125,55.25) ; v1(90.375,55.375) 90.625,55.125 U10.40@90.625,53.65 ; v1(91.125,85.25) U10.140@91.125,87.35 ; v1(95.75,57.75) 97.125,56.375 U10.53@97.125,53.65 ; v1(96.625,84.75) U10.129@96.625,87.35 ; U10.60@100.625,53.65 100.65,53.625 v1(102.625,53.625) 102.625,55.65 U10.61@102.725,55.75 ; U10.121@100.625,87.35 100.625,85.125 99.625,84.125 99.625,83.25 100.125,82.75 v1(100.75,82.75) U10.115@102.725,82.75 ; v1(101,67.5) 101.25,67.75 U10.85@102.725,67.75 ; v1(101,75.625) 101.125,75.75 U10.101@102.725,75.75 ; v1(101.125,61.5) 101.125,61.539 101.836,62.25 U10.74@102.725,62.25
  Top Layer w0.5: D4.1@66.375,96.875 66.375,100.163 P1.4@68.973,102.761 ; v2(85.125,95) 87,93.125 v2(87,90.125)
  Bottom Layer w0.3: v1(70,53.625) 72.25,53.625 73,54.375 73,57.575 C68.2@72.95,57.625 72.95,58.85 73.95,59.85 ; v1(71,65.75) 72.55,65.75 C34.2@72.625,65.825 73.925,65.825 ; v1(71.125,84.125) 72.175,84.125 ; v1(71.25,73.75) 71.3,73.7 C29.2@72.75,73.7 73.95,73.7 ; v1(71.25,77.125) 72.7,77.125 C28.2@72.75,77.075 73.95,77.075 ; v1(71.25,81.25) 71.325,81.325 C26.2@72.875,81.325 ; v1(71.5,61.75) 71.575,61.825 C35.2@72.625,61.825 73.95,61.825 73.95,59.85 ; 74,81.375 73.95,81.325 C26.2@72.875,81.325 ; v1(75.625,56.625) 75.625,58.175 C30.2@75.55,58.25 73.95,59.85 ; v1(79.625,85.5) 79.7,85.425 C39.2@79.7,84.25 79.7,83.325 79,82.625 77.75,82.625 77.125,83.25 77.125,84.875 76.25,85.75 v1(74.125,85.75) 72.5,85.75 72.175,85.425 C67.2@72.175,84.75 72.175,84.125 ; v1(80.125,55.25) 79.675,55.7 C36.2@79.675,56.5 79.675,57.425 80.125,57.875 ; 89.875,57.75 89.925,57.7 C38.2@89.925,56.5 89.925,55.825 v1(90.375,55.375) ; v1(91.125,85.25) 91.575,84.8 C40.2@91.575,83.875 91.575,82.325 ; v1(95.75,57.75) 95.8,57.7 C37.2@95.8,56.5 ; 96.625,82.25 v1(96.625,84.75) ; 97.8,75.55 C27.2@99.5,75.55 100.925,75.55 v1(101,75.625) ; 97.825,67.425 C42.2@99.375,67.425 99.45,67.5 v1(101,67.5) ; 97.875,61.25 99.925,61.25 C41.2@100,61.175 100.325,61.5 v1(101.125,61.5) 101.125,60.625 99.875,59.375 99.875,57.625 102.7,54.8 C31.2@103.125,54.8 ; 97.875,82.25 98.575,81.55 C33.2@99.25,81.55 100.55,81.55 100.75,81.75 v1(100.75,82.75) ; v1(102.625,53.625) 104.7,55.7 C69.2@105.125,55.7 ; 72.175,84.125 C32.2@72.175,83.25 72.175,82.025 C26.2@72.875,81.325
  Bottom Layer w0.5: C4.1@56.5,105.25 58.989,102.761 P1.4@68.973,102.761 71.739,102.761 80.5,94 84.125,94 v2(85.125,95) 85.175,95.05 U2.2@88,95.05 ; 74.125,61.5 75,60.625 76.375,60.625 77.5,61.75 79.875,61.75 80.5,61.125 80.5,57.875 ; v2(87,90.125) 88.625,88.5 88.625,82.75 89.125,82.25 92.75,82.25 ; 88,97.5 U2.2@88,100.8
2.5V: C3.1 C57.2 C58.2 C59.2 C60.2 D3.1 P1.3 R4.2 R39.2 R45.2 R46.2 R47.2 U1.2 U2.3 U10.3 U10.58 U10.123 U10.178 | length 181.6
  Top Layer w0.3: 72.125,52.75 U10.3@72.125,53.65 72.125,57 76.25,61.125 v1(76.25,61.75) ; U10.178@72.125,87.35 72.125,86 v1(75.5,82.625) ; v1(85.25,56.625) 86.5,57.875 93.5,57.875 94.375,58.75 v1(94.375,60.25) 94.5,60.25 99.625,55.125 U10.58@99.625,53.65 ; v1(96,80.5) 96,82.836 99.577,86.413 99.577,87.302 U10.123@99.625,87.35
  Top Layer w0.5: C3.1@56.5,95.085 58.29,96.875 D3.1@61.75,96.875 61.75,99.13 P1.3@67.177,104.557 ; v2(83.75,96.75) 83.75,92.875 v2(85.5,91.125)
  Bottom Layer w0.3: v1(75.5,82.625) 75.5,81.75 75.95,81.3 78.45,81.3 79.125,80.625 79.125,78.125 ; v1(76.25,61.75) 79.375,64.875 79.375,69 ; R47.2@80.5,77.875 R45.2@84.25,77.875 ; R39.2@84.625,40.125 84.625,56 v1(85.25,56.625) ; 85.875,77.5 87.75,77.5 ; 89,77.5 95,77.5 95,80.55 v1@96.05,80.55 ; 93.375,69.625 93.375,61.375 93.325,61.425 C59.2@93.325,60.25 v1(94.375,60.25)
  Bottom Layer w0.5: P1.3@67.177,104.557 80.318,104.557 82.75,102.125 ; v2(83.75,96.75) 83.75,101.125 82.75,102.125 ; R4.2@83.75,106.125 84.1,106.125 85.425,104.8 ; v2(85.5,91.125) 85.5,88.875 87.75,86.625 87.75,77.5 ; 89.5,107.125 U1.2@89.5,110.55 ; U2.3@90.3,100.8 90.3,102.075 89.5,102.875 U1.2@89.5,104.8 85.425,104.8 ; 82.75,102.125 85.425,104.8